# Altium PCB PCB.PcbDoc
Units mil, origin at the board's own origin, x right, y up, seen from the top; angles counter-clockwise.
Board outline 1980 x 2440 mil, 2 copper layers (Top Layer, Bottom Layer); 20 components, 36 nets, 119 pads, 0 vias.
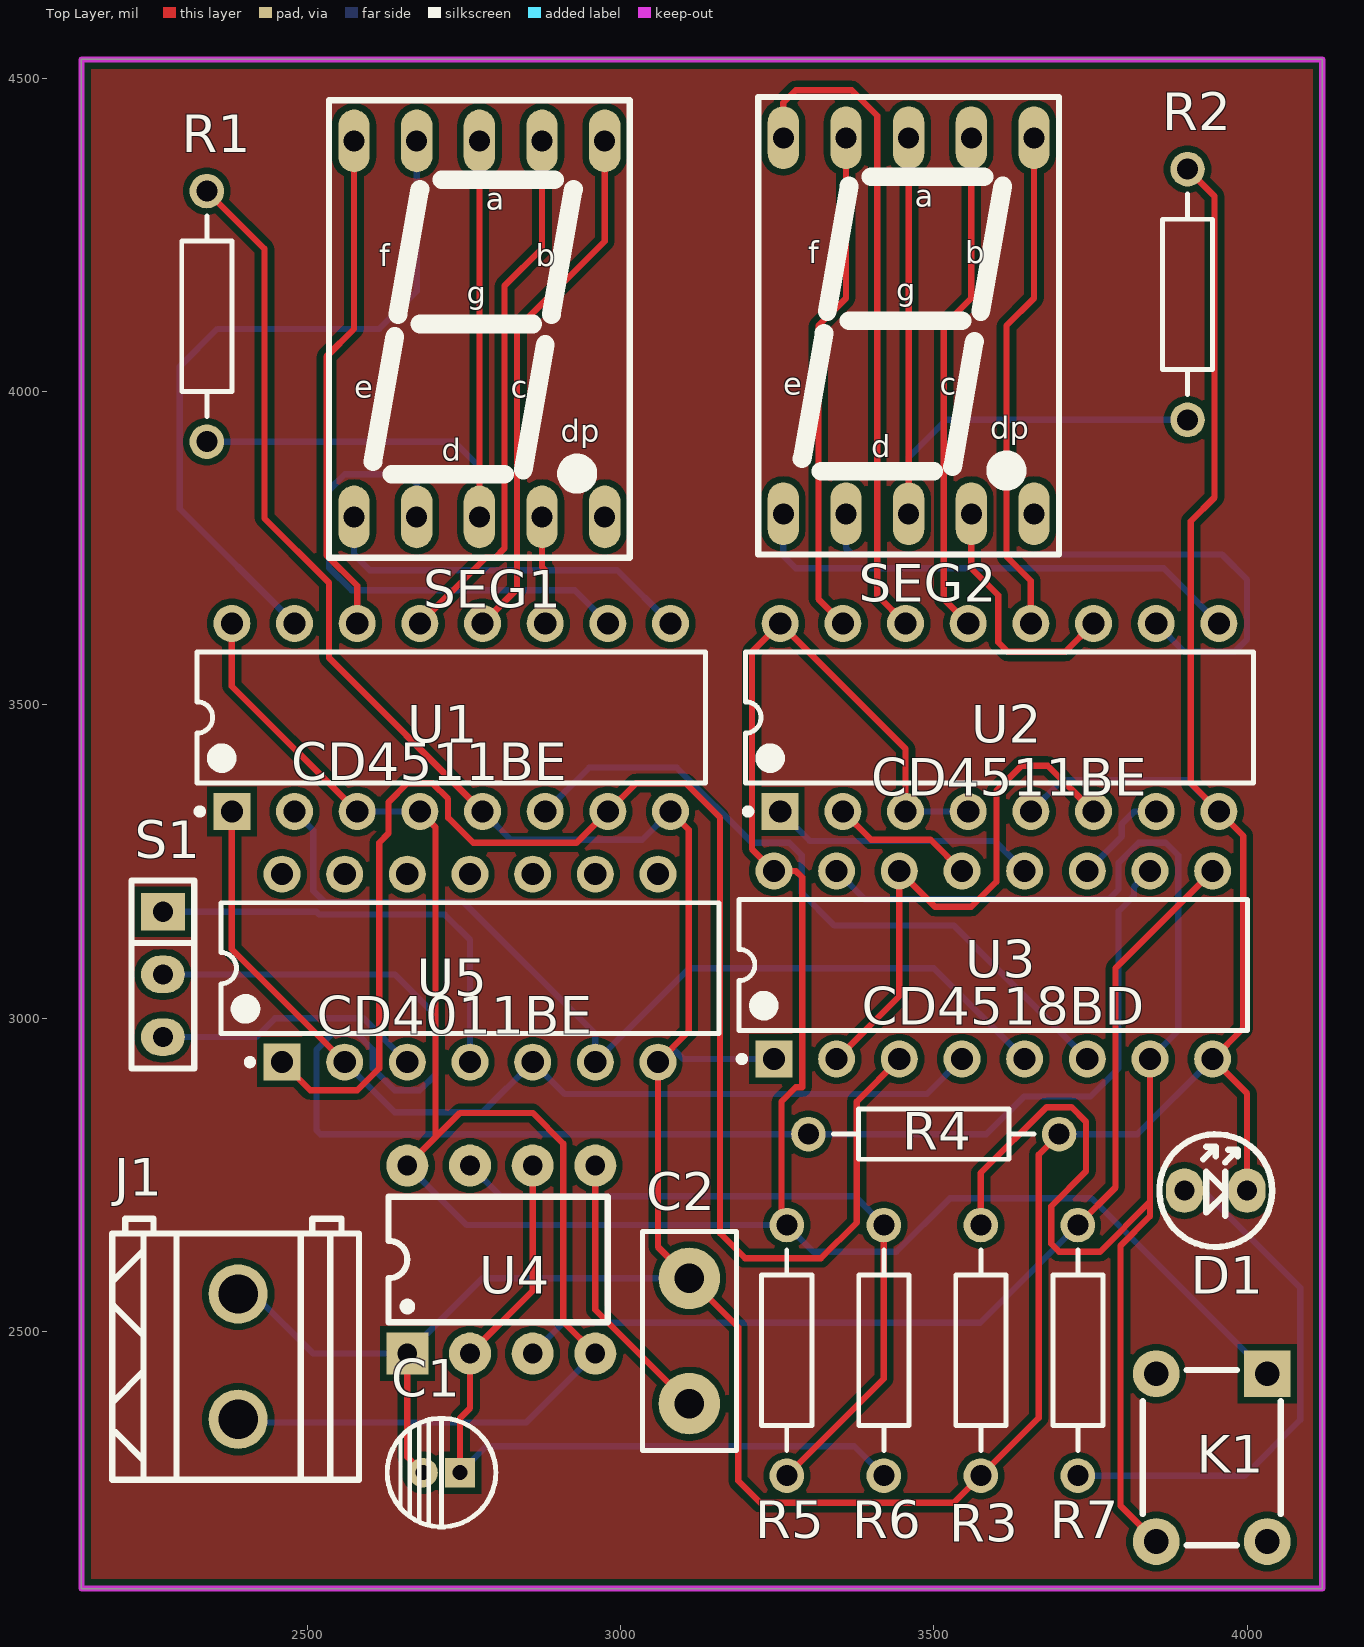
[diagram p0: Top Layer view]
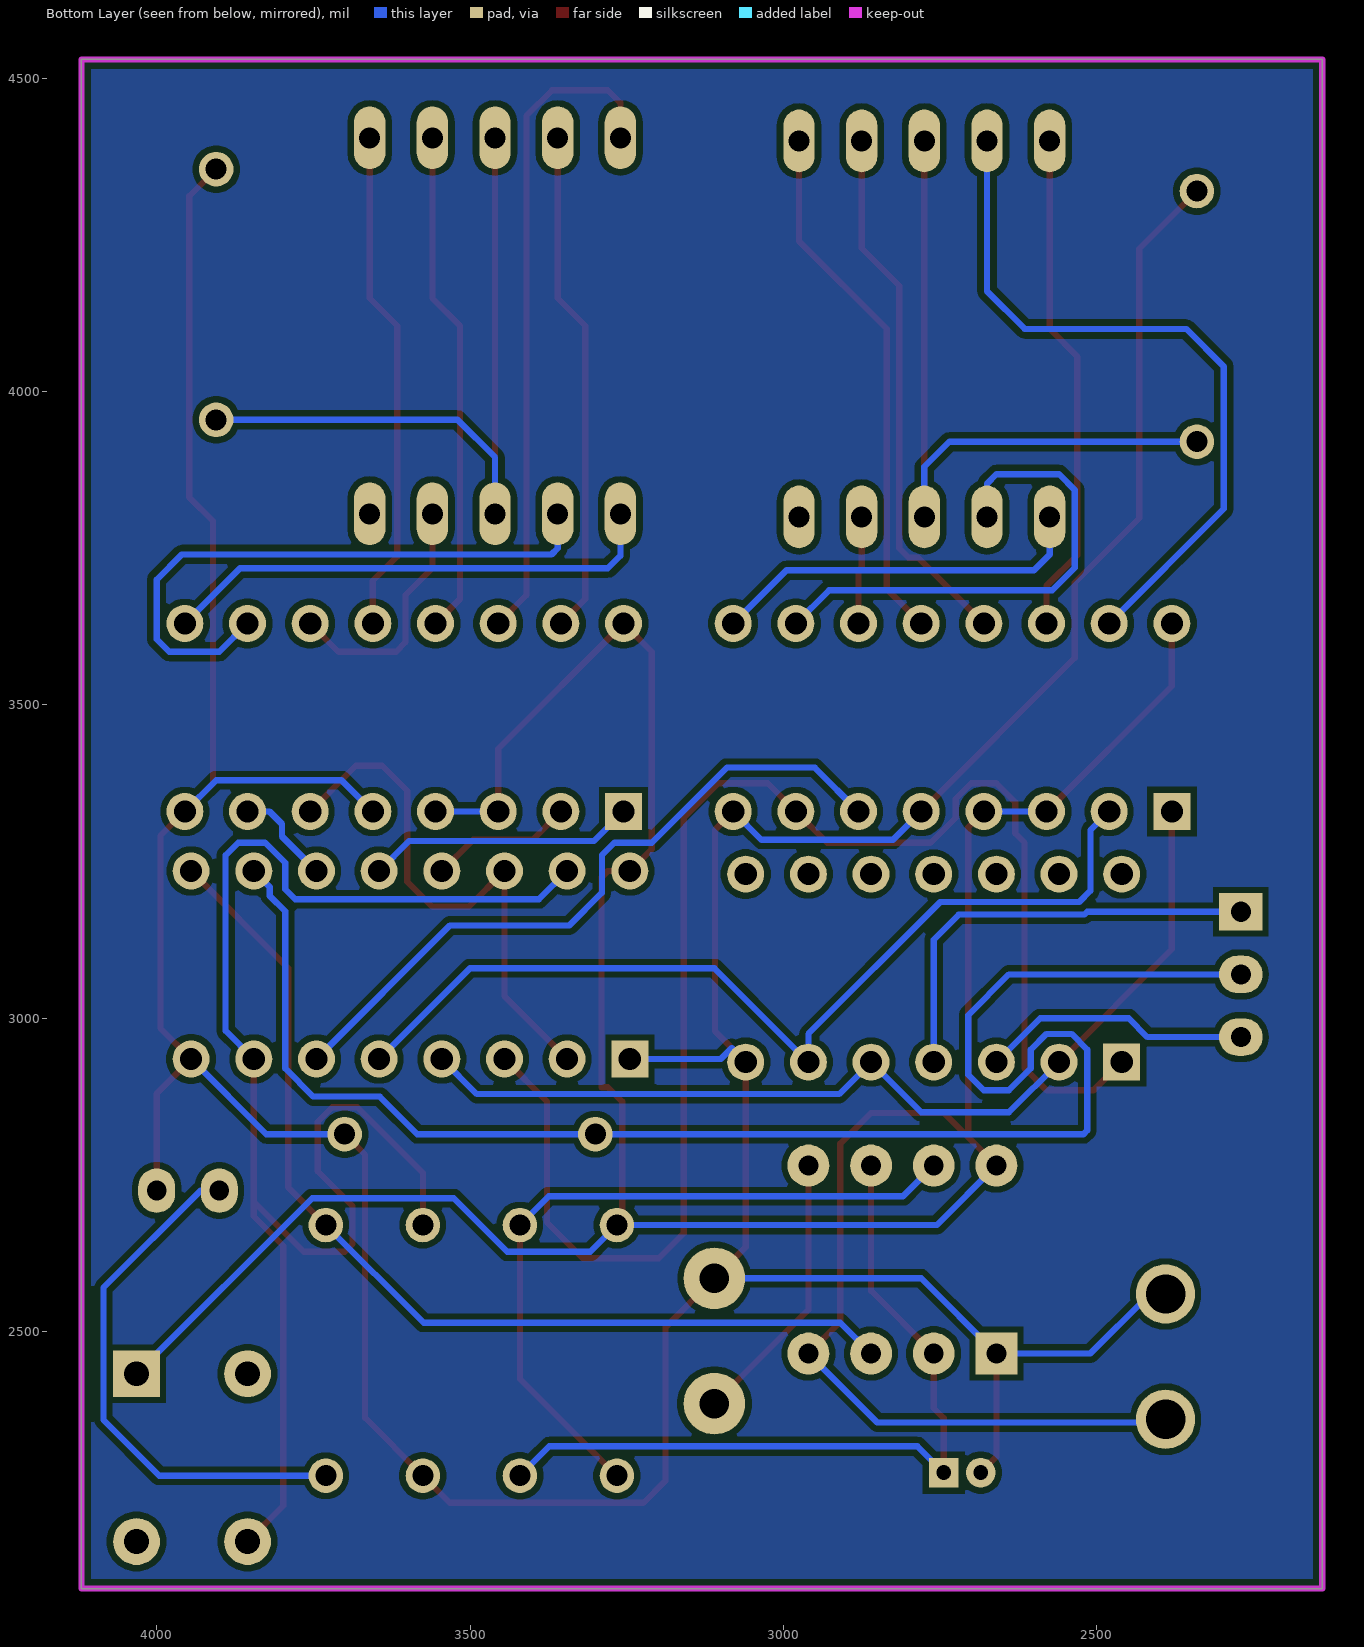
[diagram p1: Bottom Layer view, seen from below]
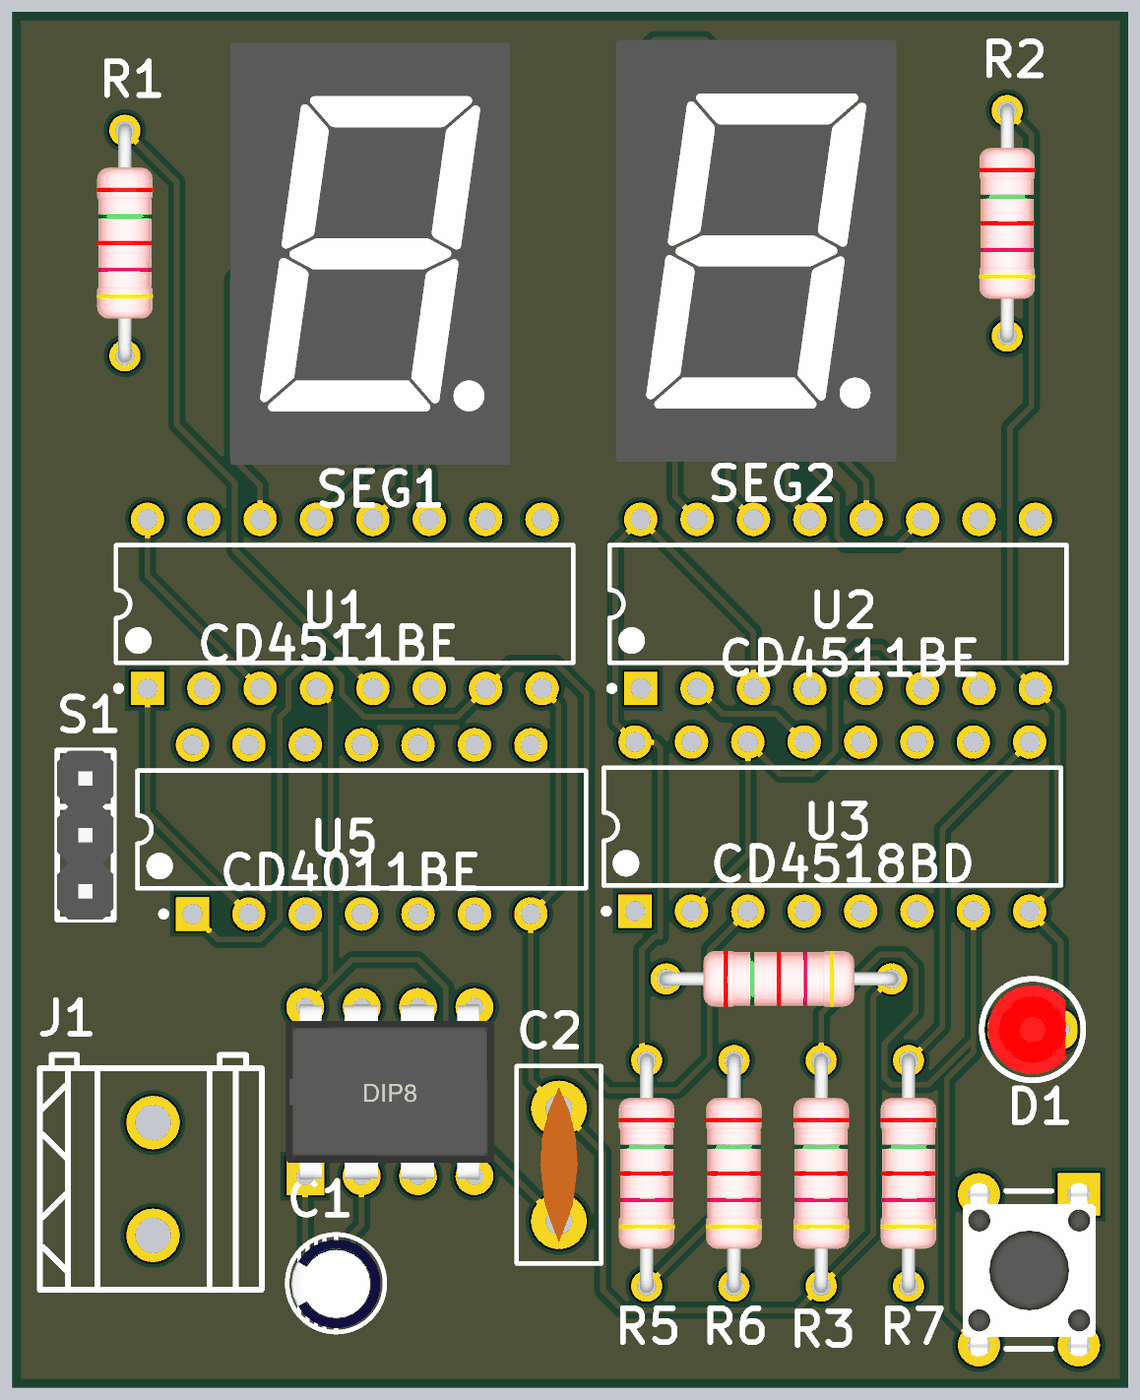
[diagram p2: 3D render of the assembled board from above, using the file's embedded part models]

## Layer stack, top to bottom
Top Solder: solder mask 0.4, Solder Resist, Dk 3.5
Top Layer: signal copper 1.4
Dielectric 1: dielectric 12.6, FR-4, Dk 4.8
Bottom Layer: signal copper 1.4
Bottom Solder: solder mask 0.4, Solder Resist, Dk 3.5

## Board outline
2140,2090 2140,4530 4120,4530 4120,2090

## Design rules (kind name [scope] priority, off if disabled: settings)
Clearance [All] p1: gap=10 ignorepadtopadclearanceinfootprint=FALSE except(0: Arc-Hole Track-Hole SMDPad-Hole THPad-Hole Via-Hole Fill-Hole Poly-Hole Region-Hole Text-Hole)
PolygonConnect [All] p1: connectstyle=Relief reliefconductorwidth=10 reliefentries=4 polygonreliefangle="90 Angle" airgapwidth=10
RoutingVias [All] p1: holewidth=28 width=50 viastyle="Through Hole" minholewidth=28 minwidth=50 maxholewidth=28 maxwidth=50
SolderMaskExpansion [All] p1: expansion=4 istentingtop=FALSE
Width [All] p1: maxlimit=10 minlimit=10 preferedwidth=10
30 further rules are at their usual default settings.

## Components (designator, comment, footprint, x,y, rotation, side; value= is the part's Value field where it differs from the comment)
C1 "10uF" DIP-EC1.5X4X8 2744.06,2275 r180 top
C2 "103" RAD-0.2 3110,2385 r90 top
D1 "LED" LED3-RED 3900,2725 r0 top
J1 "POWER" CONN-TH_2P-P5.08_DB128L-5.08-2P 2390,2460 r270 top
K1 "CLR" DIP-6X6X6 4032.17,2432.72 r270 top
R1 "200" AXIAL0.4 2380,3790 r90 top
R2 "200" AXIAL0.4 3945,3825 r90 top
R3 "10K" AXIAL0.4 3615.17,2140 r90 top
R4 "10K" AXIAL0.4 3830,2855 r180 top
R5 "47K" AXIAL0.4 3305.5,2140 r90 top
R6 "47K" AXIAL0.4 3460.34,2140 r90 top
R7 "510" AXIAL0.4 3770,2140 r90 top
S1 "SS-12D10" "Pin HDR1X3/2.54mm-S" 2270,3170 r0 top
SEG1 "0.56IN-1-K" 0.56IN-1P 2575,3800 r0 top
SEG2 "0.56IN-1-K" 0.56IN-1P 3260,3805 r0 top
U1 "CD4511BE" DIP-16 2730,3480 r90 top
U2 "CD4511BE" DIP-16 3605,3480 r90 top
U3 "CD4518BD" DIP-16 3595,3085 r90 top
U4 "NE555P" DIP8 2810,2615 r90 top
U5 "CD4011BE" DIP-14 2760,3080 r90 top

## Footprints (in the part's own frame and the unit in brackets; to place one, negate y for a bottom-side part, rotate by r counter-clockwise, add the part's x,y. Pads: shape width x height; smd on the part's side, far side on the other; paste and mask are expansions set on the pad)
0.56IN-1P [mm]
  oval 1.27x2.54 hole 0.85: 1(0,0) 2(2.54,0) 3(5.08,0) 4(7.62,0) 5(10.16,0) 6(10.16,15.24) 7(7.62,15.24) 8(5.08,15.24) 9(2.54,15.24) 10(0,15.24)
  silkscreen extent -1.02,-1.65 11.18,16.89, body extent -1.22,-1.85 11.38,17.14, height 8
AXIAL0.4 [mm] "1/4W/1/2W"
  round 1.4 hole 0.85: 1(3.302,1.016) 2(13.462,1.016)
  silkscreen extent 4.32,0 12.45,2.03, body extent 3,-0.24 13.76,2.28, height 2.63
CONN-TH_2P-P5.08_DB128L-5.08-2P [mm]
  round 2.4 hole 1.6: 1(-2.54,0) 2(2.54,0)
  silkscreen extent -5.59,-5.1 4.99,4.9
DIP8 [mm]
  rect 1.7x1.7 hole 0.8: 1(-3.81,3.81)
  round 1.7 hole 0.8: 2(-3.81,1.27) 3(-3.81,-1.27) 4(-3.81,-3.81) 5(3.81,-3.81) 6(3.81,-1.27) 7(3.81,1.27) 8(3.81,3.81)
  silkscreen extent -2.54,-4.32 2.54,4.57, body extent -3.94,-4.7 3.91,4.7, height 4.5
DIP-6X6X6 [mm]
  rect 1.9x1.9 hole 1: 1(0,0)
  round 1.9 hole 1: 2(0,-4.5) 3(6.8,-4.5) 4(6.8,0)
  silkscreen extent -0.16,-5.04 6.96,0.54, body extent -0.68,-5.24 7.53,0.76, height 5.95
DIP-14 [mm] "DIP; 14 Leads; Row Spacing 7.62 mm; Pitch 2.54 mm"
  rect 1.5x1.5 hole 0.9: 1(-3.81,7.62)
  round 1.5 hole 0.9: 2(-3.81,5.08) 3(-3.81,2.54) 4(-3.81,0) 5(-3.81,-2.54) 6(-3.81,-5.08) 7(-3.81,-7.62) 8(3.81,-7.62) 9(3.81,-5.08) 10(3.81,-2.54) 11(3.81,0) 12(3.81,2.54) 13(3.81,5.08) 14(3.81,7.62)
  silkscreen extent -3.93,-10.1 2.65,10.1, body extent -3.6,-10.1 3.6,10.1, height 5.08
DIP-16 [mm] "DIP; 16 Leads; Row Spacing 7.62 mm; Pitch 2.54 mm"
  rect 1.5x1.5 hole 0.9: 1(-3.81,8.89)
  round 1.5 hole 0.9: 2(-3.81,6.35) 3(-3.81,3.81) 4(-3.81,1.27) 5(-3.81,-1.27) 6(-3.81,-3.81) 7(-3.81,-6.35) 8(-3.81,-8.89) 9(3.81,-8.89) 10(3.81,-6.35) 11(3.81,-3.81) 12(3.81,-1.27) 13(3.81,1.27) 14(3.81,3.81) 15(3.81,6.35) 16(3.81,8.89)
  silkscreen extent -3.93,-10.3 2.65,10.31, body extent -3.6,-10.28 3.6,10.28, height 5.08
DIP-EC1.5X4X8 [mm]
  rect 1.2x1.2 hole 0.6: 1(0,0)
  round 1.2 hole 0.6: 2(1.5,0)
  silkscreen extent -1.45,-2.2 2.95,2.2, body extent -1.26,-1.97 2.76,2.03, height 8.04
LED3-RED [mm]
  oval 1.5x1.8 hole 0.8: A(0,0) K(2.54,0)
  silkscreen extent -1.01,-2.29 3.56,2.29, body extent -0.74,-2 2.78,1.99, height 5.2
"Pin HDR1X3/2.54mm-S" [mil]
  rect 70x60 hole 32: 1(0,0)
  oval 70x60 hole 32: 2(0,-100) 3(0,-200)
  silkscreen extent -50,-250 50,50, body extent -50,-250 50,50, height 336
RAD-0.2 [mm]
  round 2.5 hole 1.2: 1(0,0) 2(5.08,0)
  silkscreen extent -1.91,-1.91 6.98,1.91, body extent -0.96,-0.85 6.04,0.85, height 7.06

## Part data
C1: library part DIP_ECAP, "直插电解电容"
C2: library part CAP, "无极性电容"
J1: library part "Pin HDR1X2"
K1: library part KEY
R1 R2 R3 R4 R5 R6 R7: library part RES, "电阻"
SEG1 SEG2: "1位0.56寸共阴数码管"
U1 U2: library part 4511
U3: library part 4518
U4: library part NE555
U5: library part 4011, "Quad 2-Input NAND Gate"

## Nets (pads, with @x,y where several pads share a name; then routed paths per layer and width w, separated by ;. In a path a pad name is that pad's centre, name@x,y a point inside that pad or via, vN(x,y) a via of type N, cw(c..) or ccw(c..) an arc to the next point about the centre after c; other vN are vias at no path point)
GND: C1.2 C2.2 D1.K J1.1 R1.2 R2.2 R3.1 R4.1 U1.5 U1.8 U2.5 U2.8 U3.1 U3.8 U4.1 U5.7 | length 7235.5
  Top Layer w10: R1.2 2432,4228 2432,3798 2535,3695 2535,3575 U1.5 ; U4.1 2660,2300 C1.2 ; U1.8 3109,3301 3109,2979 U5.7 3060,2635 C2.2 3188,2507 3188,2262 3223,2227 3532.17,2227 R3.1 3667.44,2362.27 3667.44,2782.44 R4.1 ; R2.2 3948,4312 3948,3831 3910,3793 3910,3375 U2.8 3994,3291 3994,2984 U3.8 4000,2880 D1.K
  Bottom Layer w10: J1.1@2420,2555 2510,2465 U4.1 2780,2585 C2.2 ; U1.5 2825,3285 3035,3285 U1.8 ; U5.7 3082.5,2952.5 3100,2935 U3.1 ; U2.5 3705,3380 3905,3380 U2.8 ; R4.1 3825,2815 U3.8
NetC1_1: C1.1 R6.1 U4.2 U4.6 | length 1251.2
  Top Layer w10: C1.1 2744.06,2362 2760,2377.94 U4.2 2860,2565 U4.6
  Bottom Layer w10: C1.1 2786.06,2317 3373.34,2317 R6.1
NetC2_1: C2.1 U4.5 | length 442.1
  Top Layer w10: U4.5 2960,2535 C2.1
NetD1_A: D1.A R7.1 | length 852.1
  Bottom Layer w10: R7.1 3996,2270 4085,2359 4085,2570 3930,2725 D1.A
NetK1_3: K1.3 R3.2 U3.7 U3.15 | length 2508.2
  Top Layer w10: R3.2 3575.17,2753.17 3680,2858 3720,2858 3743,2835 3743,2755.56 3687.44,2700 3687.44,2640 3700,2627.44 3765.44,2627.44 3845,2707 ; U3.7 3845,2707 ; K1.3 3798,2222 3798,2637 3845,2684 3845,2707
  Bottom Layer w10: U3.15 3390,3190 3779,3190 3795,3206 3795,3247.97 3827.03,3280 3870,3280 3890,3260 3890,2980 U3.7
NetR1_1: R1.1 SEG1.3 SEG1.8 | length 1131.6
  Top Layer w10: SEG1.3 SEG1.8
  Bottom Layer w10: R1.1 2735,3920 2775,3880 SEG1.3
NetR2_1: R2.1 SEG2.3 SEG2.8 | length 1159.9
  Top Layer w10: SEG2.3 SEG2.8
  Bottom Layer w10: SEG2.3 3460,3895 3520,3955 R2.1
NetR4_2: R4.2 S1.2 U3.10 | length 2613.2
  Bottom Layer w10: S1.2 2640,3070 2705,3005 2705,2910 2680,2885 2640,2885 2605,2920 2605,2950 2580,2975 2540,2975 2515,2950 2515,2821 2521,2815 R4.2 3584,2815 3644,2875 3750,2875 3795,2920 3795,3170.64 3819.5,3195.13 3819.5,3209.5 U3.10
NetR5_1: R5.1 R6.2 U4.7 | length 1163.8
  Top Layer w10: R5.1 3420.34,2424.83 R6.2
  Bottom Layer w10: U4.7 2809,2716 3374.34,2716 R6.2
NetR7_2: R7.2 U3.9 U4.3 | length 1609
  Top Layer w10: R7.2 3790,2730 3790,3080 U3.9
  Bottom Layer w10: U4.3 2909,2514 3574,2514 R7.2
NetS1_1: S1.1 U5.4 | length 703.9
  Bottom Layer w10: S1.1 2515,3170 2519.53,3165.47 2720,3165.47 2760,3125.47 U5.4
NetS1_3: S1.3 U5.3 | length 431.4
  Bottom Layer w10: S1.3 2419,2970 2449,3000 2590,3000 U5.3
NetSEG1_1: SEG1.1 U1.9 | length 610.6
  Bottom Layer w10: SEG1.1 2575,3740 2600,3715 2995,3715 U1.9
NetSEG1_2: SEG1.2 U1.10 | length 815.4
  Bottom Layer w10: SEG1.2 2675,3853 2660,3868 2560,3868 2535,3843 2535,3719 2571,3683 2927,3683 U1.10
NetSEG1_4: SEG1.4 U1.11 | length 172.1
  Top Layer w10: SEG1.4 2875,3720 2880,3715 U1.11
NetSEG1_6: SEG1.6 U1.12 | length 850.8
  Top Layer w10: U1.12 2835,3685 2835,4100 2975,4240 SEG1.6
NetSEG1_7: SEG1.7 U1.13 | length 859.6
  Top Layer w10: U1.13 2785,3735 2800,3735 2815,3750 2815,4169 2875,4229 SEG1.7
NetSEG1_9: SEG1.9 U1.15 | length 1153.5
  Bottom Layer w10: U1.15 2297,3813 2297,4040 2357,4100 2615,4100 2675,4160 SEG1.9
NetSEG1_10: SEG1.10 U1.14 | length 808.5
  Top Layer w10: SEG1.10 2575,4100 2531,4056 2531,3739 2580,3690 U1.14
NetSEG2_1: SEG2.1 U2.9 | length 806.7
  Bottom Layer w10: SEG2.1 3260,3738 3280,3718 3867,3718 U2.9
NetSEG2_2: SEG2.2 U2.10 | length 982.6
  Bottom Layer w10: SEG2.2 3360,3750 3370,3740 3960,3740 4000,3700 4000,3605 3980,3585 3900,3585 U2.10
NetSEG2_4: SEG2.4 U2.11 | length 399.7
  Top Layer w10: SEG2.4 3560,3718 3603,3675 3603,3600 3618,3585 3710,3585 U2.11
NetSEG2_6: SEG2.6 U2.12 | length 809.4
  Top Layer w10: U2.12 3655,3698 3616,3737 3616,4105 3660,4149 SEG2.6
NetSEG2_7: SEG2.7 U2.13 | length 809.4
  Top Layer w10: U2.13 3516,3669 3516,4105 3560,4149 SEG2.7
NetSEG2_9: SEG2.9 U2.15 | length 809.4
  Top Layer w10: U2.15 3316,3669 3316,4105 3360,4149 SEG2.9
NetSEG2_10: SEG2.10 U2.14 | length 1059.9
  Top Layer w10: SEG2.10 3260,4461 3280,4481 3369,4481 3410,4440 3410,3675 U2.14
NetU1_1: U1.1 U3.4 U5.2 U5.5 | length 1570.2
  Top Layer w10: U1.1 2380,3110 U5.2
  Bottom Layer w10: U5.2 2640,2850 2780,2850 U5.5 2911,2879 3489,2879 U3.4
NetU1_2: U1.2 U3.5 U5.6 | length 1535.8
  Bottom Layer w10: U1.2 2510,3300 2510,3203.47 2528,3185.47 2749.53,3185.47 2960,2975 U5.6 3110,3080 3500,3080 U3.5
NetU1_6: U1.6 U3.6 | length 1121.8
  Bottom Layer w10: U1.6 2950,3400 3090,3400 3210,3280 3269.53,3280 3289.53,3260 3289.53,3200 3341.53,3148 3532,3148 U3.6
NetU1_7: U1.7 U3.3 U5.1 | length 2490.2
  Top Layer w10: U5.1 2505,2885 2580,2885 2615,2920 2615,3280 2630,3295 2630,3345 2660,3375 2700,3375 2725,3350 2725,3320 2765,3280 2930,3280 U1.7 3025,3375 3104,3375 3159,3320 3159,2657 3199,2617 3320,2617 3377,2674 3377,2867 U3.3
NetU2_1: U2.1 U3.12 | length 429.4
  Bottom Layer w10: U2.1 3302,3283 3597,3283 U3.12
NetU2_2: U2.2 U3.13 | length 229.4
  Top Layer w10: U2.2 3400,3285 3495,3285 U3.13
NetU2_6: U2.6 U3.2 U3.14 | length 883.4
  Top Layer w10: U3.2 3445,3035 U3.14 3502,3178 3560,3178 3600,3218 3600,3363 3640,3403 3682,3403 U2.6
NetU2_7: U2.7 U3.11 | length 161.1
  Bottom Layer w10: U3.11 3800,3290 3800,3310 3820,3330 U2.7
VCC: J1.2 K1.1 R5.2 U1.3 U1.4 U1.16 U2.3 U2.4 U2.16 U3.16 U4.4 U4.8 | length 5377.8
  Top Layer w10: U1.16 2380,3530 U1.3 ; U4.8 2705,2810 ; U1.4 2705,3305 2705,2810 ; U4.4 2909,2516 2909,2800 2860,2849 2744,2849 2705,2810 ; R5.2 3257,2678.5 3257,2867 3280,2890 3290,2890 3290,3225 3280,3235 U3.16 3210,3270 3210,3585 U2.16 3455,3430 U2.3
  Bottom Layer w10: J1.2@2420,2355 2850,2355 U4.4 ; U1.3 U1.4 ; U4.8 2755,2670 R5.2 3308.06,2627.44 3440.44,2627.44 3526,2713 3751.88,2713 K1.1 ; U2.3 U2.4
VDD: U5.14
pads on no net: K1.2 K1.4 SEG1.5 SEG2.5 U5.8 U5.9 U5.10 U5.11 U5.12 U5.13

## Polygon pours and split planes (outlines as drawn)
no net on Bottom Layer "NONET_L-01_P-001" (solid, pour order 0): 2140,4530 4120,4530 4120,2090 2140,2090
no net on Top Layer "NONET_L-01_P-001" (solid, pour order 1): 2140,4530 4120,4530 4120,2090 2140,2090

## Keep-outs
Keep-Out Layer:
  the board outline again, w10

## Text inside footprints (layer, text, board x,y; h text height)
SEG1: Top Overlay "c" at 2825,3990 h35.43; Top Overlay "dp" at 2905,3920 h35.43; Top Overlay "e" at 2575,3990 h35.43; Top Overlay "d" at 2715,3890 h35.43; Top Overlay "a" at 2785,4290 h35.43; Top Overlay "g" at 2755,4140 h35.43; Top Overlay "b" at 2865,4200 h35.43; Top Overlay "f" at 2615,4200 h35.43
SEG2: Top Overlay "c" at 3510,3995 h35.43; Top Overlay "dp" at 3590,3925 h35.43; Top Overlay "e" at 3260,3995 h35.43; Top Overlay "d" at 3400,3895 h35.43; Top Overlay "a" at 3470,4295 h35.43; Top Overlay "g" at 3440,4145 h35.43; Top Overlay "b" at 3550,4205 h35.43; Top Overlay "f" at 3300,4205 h35.43